# Altium PCB FIT_PM_Dual_Range_AFE.PcbDoc (part 13 of 17)
Units mm, origin at the board's own origin, x right, y up, seen from the top; angles counter-clockwise.
Board outline 259 x 114 mm, 8 copper layers (Top Layer, Mid-Layer 1, Mid-Layer 2, Layer 1, Layer 2, Mid-Layer 3, Mid-Layer 4, Bottom Layer), stack 1.616 mm thick; 963 components, 806 nets, 4757 pads, 2208 vias.
Unrouted connection lines stored in the file: 682.
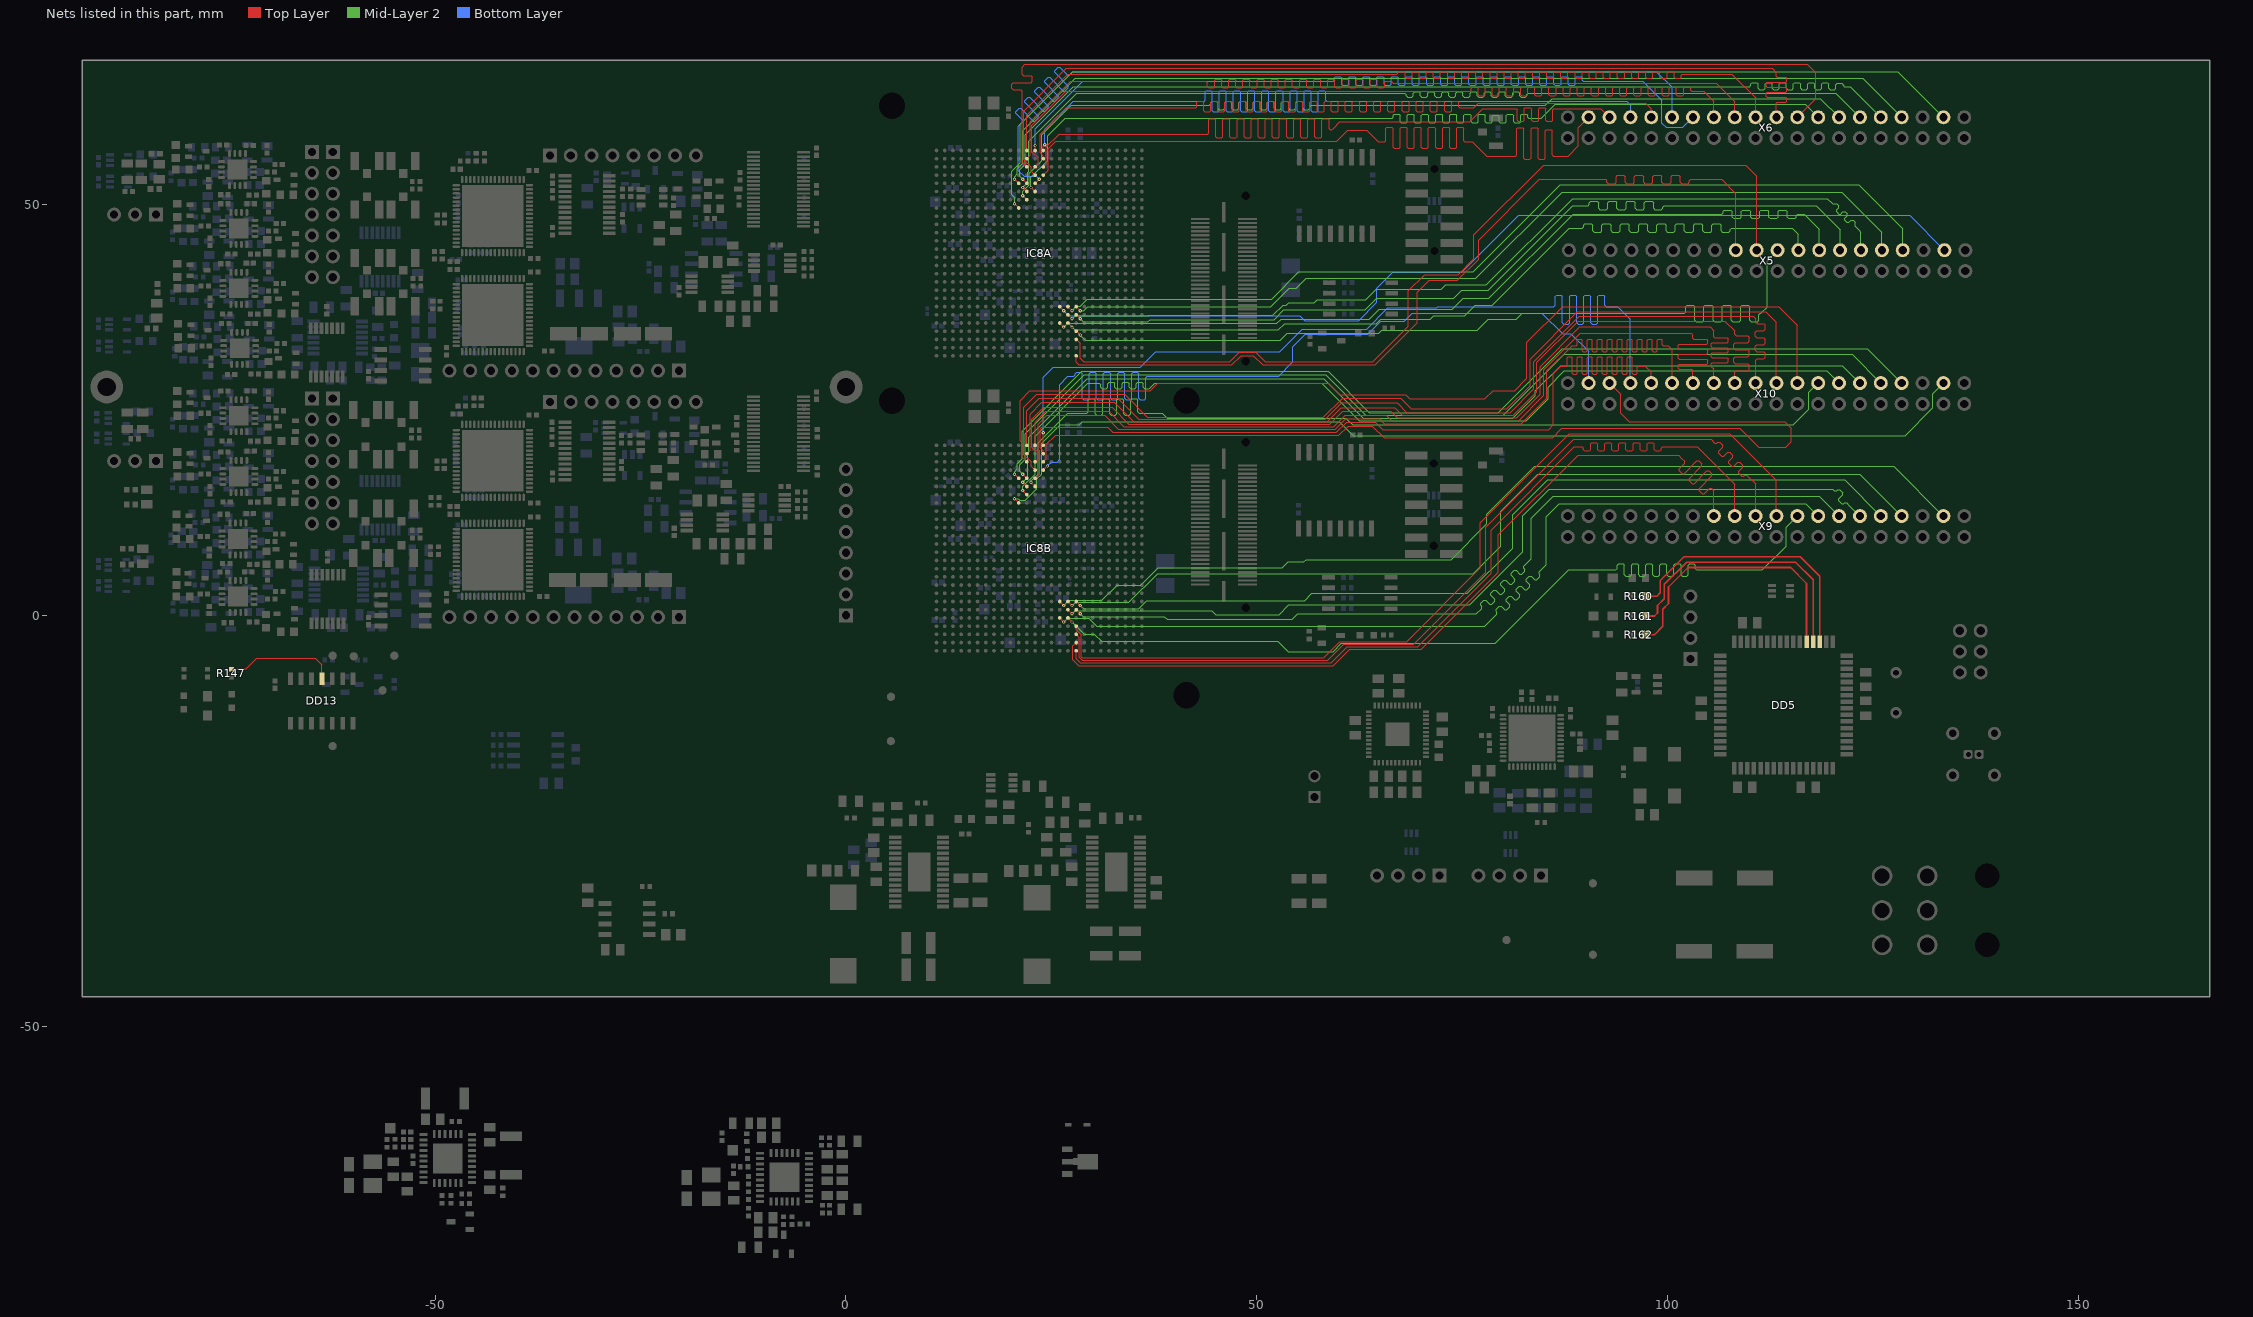
[diagram p15: the nets of this part, all layers, seen from the top]

## Via types
v1: diameter 0.5, hole 0.2, Top Layer to Bottom Layer, tented both sides, 1234 vias
v2: diameter 0.4, hole 0.2, Top Layer to Bottom Layer, tented both sides, 876 vias
v3: diameter 1, hole 0.6, Top Layer to Bottom Layer, tented both sides, 74 vias
v4: diameter 0.8, hole 0.4, Top Layer to Bottom Layer, tented both sides, 15 vias
v5: diameter 0.5, hole 0.2, Top Layer to Bottom Layer, 9 vias

## Nets (pads, with @x,y where several pads share a name; then routed paths per layer and width w, separated by ;. In a path a pad name is that pad's centre, name@x,y a point inside that pad or via, vN(x,y) a via of type N, cw(c..) or ccw(c..) an arc to the next point about the centre after c; other vN are vias at no path point) (continued)
LA0_6_2: IC8B.B9 X9.25 | length 110.2
  Top Layer w0.1: IC8B.B9@28.019,-3.314 27.619,-3.714 27.619,-5.428 28.315,-6.124 59.327,-6.124 61.333,-4.117 70.045,-4.117 79.426,5.264 79.426,9.786 89.126,19.486 101.343,19.486 101.684,19.145 102.067,18.762 102.067,18.518 101.413,17.864 101.413,17.62 101.778,17.255 102.022,17.255 103.574,18.807 103.818,18.807 104.184,18.441 104.184,18.197 102.632,16.645 102.632,16.401 102.997,16.035 103.241,16.035 104.793,17.588 105.037,17.588 105.403,17.222 105.403,16.978 103.851,15.426 103.851,15.182 104.216,14.816 104.46,14.816 105.114,15.471 105.358,15.471 105.394,15.435 105.639,15.19 X9.25@105.639,12.086
LA0_7_1: IC8A.A9 X5.23 | length 109.8
  Top Layer w0.1: IC8A.A9@28.019,31.586 28.019,30.824 28.357,30.486 46.986,30.486 48.1,31.6 49.6,31.6 50.714,30.486 64.401,30.486 69.511,35.596 69.511,39.304 70.968,40.761 74.418,40.761 77.019,43.362 77.019,45.686 84.39,53.057 92.275,53.057 92.453,53.057 92.62,52.889 92.62,52.716 92.788,52.549 93.569,52.549 93.736,52.716 93.736,53.397 93.904,53.565 94.685,53.565 94.852,53.397 94.852,52.716 95.02,52.549 95.801,52.549 95.968,52.716 95.968,53.397 96.136,53.565 96.917,53.565 97.084,53.397 97.084,52.716 97.252,52.549 98.033,52.549 98.2,52.716 98.2,53.397 98.368,53.565 99.149,53.565 99.316,53.397 99.316,52.716 99.484,52.549 100.265,52.549 100.432,52.716 100.432,53.397 100.6,53.565 101.381,53.565 101.548,53.397 101.548,52.716 101.716,52.549 102.497,52.549 102.664,52.716 102.664,52.889 102.832,53.057 102.882,53.057 106.596,53.057 108.309,51.343 X5.23@108.309,44.446
LA0_7_2: IC8B.A9 X9.23 | length 109.8
  Top Layer w0.1: IC8B.A9@28.019,-4.314 28.019,-5.263 28.537,-5.781 59.08,-5.781 61.027,-3.834 69.582,-3.834 78.519,5.103 78.519,10.377 88.663,20.521 89.262,20.521 89.592,20.521 89.765,20.348 89.765,20.185 89.937,20.013 90.454,20.013 90.627,20.185 90.627,20.856 90.799,21.029 91.316,21.029 91.489,20.856 91.489,20.185 91.661,20.013 92.178,20.013 92.351,20.185 92.351,20.856 92.523,21.029 93.04,21.029 93.213,20.856 93.213,20.185 93.385,20.013 93.902,20.013 94.075,20.185 94.075,20.856 94.247,21.029 94.764,21.029 94.937,20.856 94.937,20.185 95.109,20.013 95.626,20.013 95.799,20.185 95.799,20.856 95.971,21.029 96.488,21.029 96.661,20.856 96.661,20.185 96.833,20.013 97.35,20.013 97.523,20.185 97.523,20.856 97.695,21.029 98.212,21.029 98.385,20.856 98.385,20.185 98.557,20.013 99.074,20.013 99.247,20.185 99.247,20.348 99.419,20.521 99.469,20.521 103.612,20.521 108.179,15.954 X9.23@108.179,12.086
LA0_8_1: IC8A.C9 X5.21 | length 109.7
  Top Layer w0.1: IC8A.C9@28.019,33.586 28.502,33.103 28.502,31.272 28.931,30.843 46.743,30.843 47.9,32 49.9,32 51.057,30.843 64.11,30.843 68.456,35.189 68.456,39.523 70.419,41.486 74.508,41.486 76.433,43.411 76.433,46.3 84.939,54.806 109.518,54.806 110.849,53.475 X5.21@110.849,44.446
LA0_8_2: IC8B.C9 X9.21 | length 110.6
  Top Layer w0.1: IC8B.C9@28.019,-2.314 28.419,-2.714 28.419,-5.114 28.776,-5.471 58.615,-5.471 60.572,-3.514 69.119,-3.514 77.897,5.263 77.897,10.696 88.608,21.407 105.302,21.407 105.715,20.995 105.75,20.959 105.994,20.959 106.109,21.075 106.353,21.075 106.719,20.709 106.719,20.465 106.244,19.991 106.244,19.747 106.61,19.381 106.854,19.381 107.328,19.856 107.572,19.856 107.938,19.49 107.938,19.246 107.463,18.772 107.463,18.528 107.829,18.162 108.073,18.162 108.547,18.637 108.791,18.637 109.157,18.271 109.157,18.027 108.682,17.553 108.682,17.309 109.048,16.943 109.292,16.943 109.407,17.058 109.651,17.058 109.732,16.978 110.719,15.99 X9.21@110.719,12.086
LA0_9_1: IC8A.D9 X5.19 | length 108.2
  Top Layer w0.145: IC8A.D9@28.008,34.621 v2(28.508,34.121)
  Mid-Layer 2 w0.1: v2(28.508,34.121) 29.134,33.495 36.149,33.495 52.86,33.495 53.711,34.346 64.879,34.346 65.243,34.71 76.843,34.71 78.192,36.059 81.602,36.059 82.298,36.754 101.988,36.754 102.038,36.754 102.206,36.922 102.206,37.603 102.373,37.77 103.154,37.77 103.322,37.603 103.322,35.906 103.489,35.738 104.27,35.738 104.438,35.906 104.438,37.603 104.605,37.77 105.386,37.77 105.554,37.603 105.554,35.906 105.721,35.738 106.502,35.738 106.67,35.906 106.67,37.603 106.837,37.77 107.618,37.77 107.786,37.603 107.786,35.906 107.953,35.738 108.734,35.738 108.902,35.906 108.902,37.603 109.069,37.77 109.85,37.77 110.018,37.603 110.018,35.906 110.185,35.738 110.966,35.738 111.134,35.906 111.134,36.587 111.301,36.754 111.37,36.754 111.494,36.878 112.119,37.503 112.119,43.176 X5.19@113.389,44.446
LA0_9_2: IC8B.D9 X9.19 | length 109.9
  Top Layer w0.1: IC8B.D9@28.019,-1.314 28.019,-1.784 28.619,-2.384 28.619,-5.014 28.766,-5.161 58.132,-5.161 60.089,-3.203 68.23,-3.203 77.219,5.786 77.219,11.297 88.042,22.119 107.586,22.119 113.259,16.446 X9.19@113.259,12.086
LA0_10_1: IC8A.E10 X5.17 | length 109.6
  Top Layer w0.145: IC8A.E10@27.019,35.586 v2(27.519,35.086)
  Mid-Layer 2 w0.1: v2(27.519,35.086) 27.869,34.736 52.633,34.736 53.383,35.486 64.543,35.486 65.095,36.038 71.123,36.038 71.565,36.48 75.311,36.48 76.569,37.737 78.65,37.737 88.053,47.14 89.565,47.14 89.615,47.14 89.782,47.307 89.782,47.48 89.95,47.648 90.731,47.648 90.898,47.48 90.898,46.799 91.066,46.632 91.847,46.632 92.014,46.799 92.014,47.48 92.182,47.648 92.963,47.648 93.13,47.48 93.13,46.799 93.298,46.632 94.079,46.632 94.246,46.799 94.246,47.48 94.414,47.648 95.195,47.648 95.362,47.48 95.362,46.799 95.53,46.632 96.311,46.632 96.478,46.799 96.478,47.48 96.646,47.648 97.427,47.648 97.594,47.48 97.594,46.799 97.762,46.632 98.543,46.632 98.71,46.799 98.71,47.48 98.878,47.648 99.659,47.648 99.826,47.48 99.826,46.799 99.994,46.632 100.775,46.632 100.942,46.799 100.942,47.48 101.11,47.648 101.891,47.648 102.058,47.48 102.058,46.799 102.226,46.632 103.007,46.632 103.174,46.799 103.174,47.48 103.342,47.648 104.123,47.648 104.29,47.48 104.29,46.799 104.458,46.632 105.239,46.632 105.406,46.799 105.406,47.48 105.574,47.648 106.355,47.648 106.522,47.48 106.522,46.799 106.69,46.632 107.471,46.632 107.638,46.799 107.638,46.972 107.806,47.14 108.309,47.14 115.183,47.14 115.929,46.393 X5.17@115.929,44.446
LA0_10_2: IC8B.E10 X9.17 | length 113
  Top Layer w0.145: IC8B.E10@27.019,-0.314 v2(27.519,-0.814)
  Mid-Layer 2 w0.1: v2(27.519,-0.814) 28.979,-2.274 30.24,-2.274 31.131,-3.164 52.569,-3.164 53.819,-4.414 59.319,-4.414 60.308,-3.425 79.036,-3.425 87.987,5.525 93.668,5.525 93.718,5.525 93.891,5.698 93.891,6.115 94.063,6.287 94.58,6.287 94.753,6.115 94.753,4.936 94.925,4.763 95.442,4.763 95.615,4.936 95.615,6.115 95.787,6.287 96.304,6.287 96.477,6.115 96.477,4.936 96.649,4.763 97.166,4.763 97.339,4.936 97.339,6.115 97.511,6.287 98.028,6.287 98.201,6.115 98.201,4.936 98.373,4.763 98.89,4.763 99.063,4.936 99.063,6.115 99.235,6.287 99.752,6.287 99.925,6.115 99.925,4.936 100.097,4.763 100.614,4.763 100.787,4.936 100.787,6.115 100.959,6.287 101.476,6.287 101.649,6.115 101.649,4.936 101.821,4.763 102.338,4.763 102.511,4.936 102.511,6.092 102.683,6.264 103.2,6.264 103.373,6.092 103.373,5.698 103.545,5.525 104.106,5.525 111.559,5.525 114.446,8.413 114.446,10.733 X9.17@115.799,12.086
LA0_11_1: IC8A.E11 X5.15 | length 108
  Top Layer w0.145: IC8A.E11@26.019,35.586 v2(26.519,35.086)
  Mid-Layer 2 w0.1: v2(26.519,35.086) 26.969,35.536 52.436,35.536 52.955,36.055 63.688,36.055 64.919,37.286 73.814,37.286 75.114,38.586 78.266,38.586 88.499,48.819 106.543,48.819 106.593,48.819 106.761,48.986 106.761,49.159 106.928,49.327 107.709,49.327 107.877,49.159 107.877,48.478 108.044,48.311 108.825,48.311 108.993,48.478 108.993,49.159 109.16,49.327 109.941,49.327 110.109,49.159 110.109,48.478 110.276,48.311 111.057,48.311 111.225,48.478 111.225,49.159 111.392,49.327 112.173,49.327 112.341,49.159 112.341,48.478 112.508,48.311 113.289,48.311 113.457,48.478 113.457,49.159 113.624,49.327 114.405,49.327 114.573,49.159 114.573,48.478 114.74,48.311 115.521,48.311 115.689,48.478 115.689,48.651 115.856,48.819 116.408,48.819 116.636,48.819 118.469,46.986 X5.15@118.469,44.446
LA0_11_2: IC8B.E11 X9.15 | length 109.6
  Top Layer w0.145: IC8B.E11@26.019,-0.314 v2(26.519,-0.814)
  Mid-Layer 2 w0.1: v2(26.519,-0.814) 26.969,-0.364 29.564,-0.364 30.5,-1.301 77.78,-1.301 79.206,0.125 79.241,0.16 79.241,0.404 79.126,0.519 79.126,0.763 79.491,1.129 79.735,1.129 80.21,0.654 80.454,0.654 80.819,1.02 80.819,1.264 80.345,1.738 80.345,1.982 80.71,2.348 80.954,2.348 81.429,1.873 81.673,1.873 82.038,2.239 82.038,2.483 81.564,2.957 81.564,3.201 81.93,3.567 82.173,3.567 82.648,3.092 82.892,3.092 83.257,3.458 83.257,3.702 82.783,4.176 82.783,4.42 83.149,4.786 83.392,4.786 83.867,4.311 84.111,4.311 84.477,4.677 84.477,4.921 84.361,5.036 84.361,5.28 84.443,5.362 85.241,6.16 85.241,11.98 86.847,13.586 116.839,13.586 X9.15@118.339,12.086
LA0_12_1: IC8A.F9 X5.13 | length 109.3
  Top Layer w0.145: IC8A.F9@28.019,36.586 v2(28.519,36.086)
  Mid-Layer 2 w0.1: v2(28.519,36.086) 28.869,35.736 36.759,35.736 37.019,35.996 52.119,35.996 53.309,37.186 63.219,37.186 64.619,38.586 73.963,38.586 74.963,39.586 78.194,39.586 88.479,49.87 90.272,49.87 90.322,49.87 90.489,50.038 90.489,50.211 90.656,50.378 91.438,50.378 91.605,50.211 91.605,49.53 91.772,49.362 92.554,49.362 92.721,49.53 92.721,50.211 92.888,50.378 93.67,50.378 93.837,50.211 93.837,49.53 94.004,49.362 94.786,49.362 94.953,49.53 94.953,50.211 95.12,50.378 95.902,50.378 96.069,50.211 96.069,49.53 96.236,49.362 97.018,49.362 97.185,49.53 97.185,50.211 97.352,50.378 98.134,50.378 98.301,50.211 98.301,49.53 98.468,49.362 99.25,49.362 99.417,49.53 99.417,49.703 99.584,49.87 100.635,49.87 118.085,49.87 121.009,46.946 X5.13@121.009,44.446
LA0_12_2: IC8B.F9 X9.13 | length 109.8
  Top Layer w0.145: IC8B.F9@28.019,0.686 v2(28.519,0.186)
  Mid-Layer 2 w0.1: v2(28.519,0.186) 28.869,-0.164 38.764,-0.164 39.1,-0.5 54.333,-0.5 55.011,0.177 76.743,0.177 77.371,0.805 77.406,0.84 77.406,1.084 77.291,1.199 77.291,1.443 77.656,1.809 77.9,1.809 78.375,1.334 78.619,1.334 78.984,1.7 78.984,1.944 78.51,2.418 78.51,2.662 78.875,3.028 79.119,3.028 79.594,2.553 79.838,2.553 80.203,2.919 80.203,3.163 79.729,3.637 79.729,3.881 80.094,4.247 80.338,4.247 80.813,3.772 81.057,3.772 81.422,4.138 81.422,4.382 80.948,4.856 80.948,5.1 81.314,5.466 81.557,5.466 82.032,4.991 82.276,4.991 82.641,5.357 82.641,5.601 82.526,5.716 82.526,5.96 82.832,6.266 83.434,6.868 83.434,11.816 86.105,14.486 118.479,14.486 X9.13@120.879,12.086
LA0_13_1: IC8A.F10 X5.11 | length 109.2
  Top Layer w0.145: IC8A.F10@27.019,36.586 v2(27.519,36.086)
  Mid-Layer 2 w0.1: v2(27.519,36.086) 27.921,36.487 36.843,36.487 36.856,36.5 51.956,36.5 53.199,37.743 53.583,37.743 53.907,38.067 57.001,38.067 57.344,38.411 63.244,38.411 64.519,39.686 72.469,39.686 73.014,40.231 77.946,40.231 88.452,50.737 119.468,50.737 120.06,50.145 120.096,50.109 120.346,50.109 120.357,50.121 120.608,50.121 120.858,49.87 120.858,49.62 120.585,49.347 120.585,49.097 120.835,48.846 121.086,48.846 121.358,49.119 121.609,49.119 121.859,48.869 121.859,48.619 121.586,48.346 121.586,48.096 121.836,47.845 122.087,47.845 122.36,48.118 122.61,48.118 122.86,47.868 122.86,47.618 122.849,47.606 122.849,47.356 123.282,46.923 123.549,46.656 X5.11@123.549,44.446
LA0_13_2: IC8B.F10 X9.11 | length 108.7
  Top Layer w0.145: IC8B.F10@27.019,0.686 v2(27.519,0.186)
  Mid-Layer 2 w0.1: v2(27.519,0.186) 27.921,0.587 44.513,0.587 45,0.1 52.733,0.1 53.911,1.277 75.956,1.277 82.393,7.714 82.393,12.149 85.61,15.366 120.139,15.366 120.312,15.193 120.347,15.158 120.591,15.158 120.706,15.273 120.95,15.273 121.316,14.908 121.316,14.664 120.841,14.189 120.841,13.945 121.207,13.58 121.451,13.58 121.566,13.695 121.81,13.695 122.08,13.425 X9.11@123.419,12.086
LA0_14_1: IC8A.G9 X5.9 | length 108.5
  Top Layer w0.145: IC8A.G9@28.019,37.586 v2(28.519,37.086)
  Mid-Layer 2 w0.1: v2(28.519,37.086) 28.96,37.086 29.431,37.558 51.707,37.558 53.937,39.788 54.832,39.788 56.054,41.011 76.671,41.011 87.183,51.522 121.183,51.522 126.089,46.616 X5.9@126.089,44.446
LA0_14_2: IC8B.G9 X9.9 | length 109
  Top Layer w0.145: IC8B.G9@28.019,1.686 v2(28.519,1.186)
  Mid-Layer 2 w0.1: v2(28.519,1.186) 28.916,0.789 35.623,0.789 36.619,1.786 55.819,1.786 56.719,2.686 75.645,2.686 81.143,8.183 81.143,12.232 85.396,16.486 121.559,16.486 X9.9@125.959,12.086
LA0_15_1: IC8A.G10 X5.7 | length 113
  Top Layer w0.145: IC8A.G10@27.019,37.586 v2(27.519,37.086)
  Mid-Layer 2 w0.1: v2(27.519,37.086) 28.033,37.6 28.5,37.6 29.395,38.495 51.805,38.495 55.133,41.822 76.341,41.822 86.954,52.435 123.27,52.435 128.629,47.076 X5.7@128.629,44.446
LA0_15_2: IC8B.G10 X9.7 | length 112.9
  Top Layer w0.145: IC8B.G10@27.019,1.686 v2(27.519,1.186)
  Mid-Layer 2 w0.1: v2(27.519,1.186) 27.942,1.608 34.442,1.608 37.921,5.087 76.366,5.087 79.705,8.426 79.705,12.691 84.19,17.175 123.41,17.175 X9.7@128.499,12.086
LA1_0_1: IC8A.AC13 X6.37 | length 123.3
  Top Layer w0.1: IC8A.AC13@24.019,53.586 24.619,54.186 24.619,56.798 25.548,57.727 59.76,57.727 61.087,59.053 63.411,59.053 64.804,57.661 65.544,57.661 65.594,57.661 65.723,57.79 65.723,59.31 65.853,59.439 66.456,59.439 66.585,59.31 66.585,56.965 66.715,56.835 67.318,56.835 67.447,56.965 67.447,59.31 67.577,59.439 68.18,59.439 68.309,59.31 68.309,56.965 68.439,56.835 69.042,56.835 69.171,56.965 69.171,59.31 69.301,59.439 69.904,59.439 70.033,59.31 70.033,56.965 70.163,56.835 70.766,56.835 70.895,56.965 70.895,59.31 71.025,59.439 71.628,59.439 71.757,59.31 71.757,56.965 71.887,56.835 72.49,56.835 72.619,56.965 72.619,59.31 72.749,59.439 73.352,59.439 73.481,59.31 73.481,56.965 73.611,56.835 74.214,56.835 74.343,56.965 74.343,59.31 74.473,59.439 75.076,59.439 75.205,59.31 75.205,57.79 75.335,57.661 75.87,57.661 76.244,57.661 77.999,55.906 81.481,55.906 81.531,55.906 81.66,56.035 81.66,59.202 81.789,59.332 82.393,59.332 82.522,59.202 82.522,55.624 82.651,55.495 83.255,55.495 83.384,55.624 83.384,59.202 83.513,59.332 84.117,59.332 84.246,59.202 84.246,55.624 84.375,55.495 84.979,55.495 85.108,55.624 85.108,58.977 85.237,59.106 85.841,59.106 85.97,58.977 85.97,56.035 86.099,55.906 86.554,55.906 87.886,55.906 89.119,57.139 89.119,59.346 X6.37@90.399,60.626
LA1_0_2: IC8B.AC13 X10.37 | length 117.8
  Top Layer w0.145: IC8B.AC13@24.019,17.686 v2(24.519,18.186)
  Bottom Layer w0.1: v2(24.519,18.186) 24.972,18.639 25.687,18.639 26.019,18.971 26.019,28.083 27.022,29.086 27.667,29.086 27.717,29.086 27.889,29.258 27.889,29.421 28.062,29.594 28.579,29.594 28.751,29.421 28.751,26.411 28.924,26.238 29.441,26.238 29.613,26.411 29.613,29.421 29.786,29.594 30.303,29.594 30.475,29.421 30.475,26.411 30.648,26.238 31.165,26.238 31.337,26.411 31.337,29.421 31.51,29.594 32.027,29.594 32.199,29.421 32.199,26.411 32.372,26.238 32.889,26.238 33.061,26.411 33.061,29.421 33.234,29.594 33.751,29.594 33.923,29.421 33.923,26.411 34.096,26.238 34.613,26.238 34.785,26.411 34.785,29.421 34.958,29.594 35.475,29.594 35.647,29.421 35.647,26.411 35.82,26.238 36.337,26.238 36.509,26.411 36.509,28.913 36.682,29.086 36.92,29.086 52.651,29.086 54.405,30.84 54.405,32.717 55.896,34.208 63.491,34.208 65.077,35.794 67.964,35.794 68.956,36.786 84.719,36.786 87.234,34.271 88.248,34.271 90.399,32.12 X10.37@90.399,28.266
LA1_1_1: IC8A.AD13 X6.35 | length 118.8
  Top Layer w0.1: IC8A.AD13@24.019,54.586 24.405,54.972 24.405,57.014 25.977,58.586 43.969,58.586 44.019,58.586 44.148,58.715 44.148,60.294 44.278,60.424 44.881,60.424 45.01,60.294 45.01,58.277 45.14,58.148 45.743,58.148 45.872,58.277 45.872,60.294 46.002,60.424 46.605,60.424 46.734,60.294 46.734,58.277 46.864,58.148 47.467,58.148 47.596,58.277 47.596,60.294 47.726,60.424 48.329,60.424 48.458,60.294 48.458,58.277 48.588,58.148 49.191,58.148 49.32,58.277 49.32,60.294 49.45,60.424 50.053,60.424 50.182,60.294 50.182,58.277 50.312,58.148 50.915,58.148 51.044,58.277 51.044,60.294 51.174,60.424 51.777,60.424 51.906,60.294 51.906,58.277 52.036,58.148 52.639,58.148 52.768,58.277 52.768,60.294 52.898,60.424 53.501,60.424 53.63,60.294 53.63,58.277 53.76,58.148 54.363,58.148 54.492,58.277 54.492,60.294 54.622,60.424 55.225,60.424 55.354,60.294 55.354,58.277 55.484,58.148 56.087,58.148 56.216,58.277 56.216,60.294 56.346,60.424 56.949,60.424 57.078,60.294 57.078,58.277 57.208,58.148 57.811,58.148 57.94,58.277 57.94,60.294 58.07,60.424 58.673,60.424 58.802,60.294 58.802,59.211 58.932,59.081 59.114,59.081 59.344,59.31 60.119,60.086 75.919,60.086 77.519,61.686 80.677,61.686 81.589,61.686 81.719,61.557 81.719,60.272 81.848,60.143 82.451,60.143 82.581,60.272 82.581,61.638 82.71,61.767 83.313,61.767 83.443,61.638 83.443,60.272 83.572,60.143 84.175,60.143 84.305,60.272 84.305,61.638 84.434,61.767 85.037,61.767 85.167,61.638 85.167,60.272 85.296,60.143 85.899,60.143 86.029,60.272 86.029,61.557 86.158,61.686 86.745,61.686 91.879,61.686 X6.35@92.939,60.626
LA1_1_2: IC8B.AD13 X10.35 | length 123.5
  Top Layer w0.1: IC8B.AD13@24.019,18.686 24.405,19.072 24.405,20.817 25.509,21.921 60.001,21.921 61.126,23.046 64.069,23.046 65.489,21.625 86.003,21.625 87.14,22.762 108.786,22.762 111.079,20.469 114.375,20.469 115.064,21.158 115.064,22.77 114.288,23.546 95.359,23.546 94.319,24.586 94.319,26.886 X10.35@92.939,28.266
LA1_2_1: IC8A.AF13 X6.33 | length 117.5
  Top Layer w0.1: IC8A.AF13@24.019,56.586 24.019,57.097 24.187,57.265 v2(24.187,57.291)
  Bottom Layer w0.1: v2(24.187,57.291) 24.187,59.138 27.636,62.586 43.54,62.586 43.59,62.586 43.719,62.715 43.719,63.727 43.849,63.856 44.452,63.856 44.581,63.727 44.581,61.445 44.71,61.316 45.314,61.316 45.443,61.445 45.443,63.727 45.572,63.856 46.176,63.856 46.305,63.727 46.305,61.445 46.434,61.316 47.038,61.316 47.167,61.445 47.167,63.727 47.296,63.856 47.9,63.856 48.029,63.727 48.029,61.445 48.158,61.316 48.762,61.316 48.891,61.445 48.891,63.727 49.02,63.856 49.624,63.856 49.753,63.727 49.753,61.445 49.882,61.316 50.486,61.316 50.615,61.445 50.615,63.727 50.744,63.856 51.348,63.856 51.477,63.727 51.477,61.445 51.606,61.316 52.21,61.316 52.339,61.445 52.339,63.727 52.468,63.856 53.072,63.856 53.201,63.727 53.201,61.445 53.33,61.316 53.934,61.316 54.063,61.445 54.063,63.727 54.192,63.856 54.796,63.856 54.925,63.727 54.925,61.445 55.054,61.316 55.658,61.316 55.787,61.445 55.787,63.727 55.916,63.856 56.52,63.856 56.649,63.727 56.649,61.445 56.778,61.316 57.382,61.316 57.511,61.445 57.511,63.727 57.64,63.856 58.244,63.856 58.373,63.727 58.373,62.715 58.502,62.586 59.319,62.586 95.038,62.586 95.538,62.087 95.538,60.684 X6.33@95.479,60.626
LA1_2_2: IC8B.AF13 X10.33 | length 114.3
  Top Layer w0.1: IC8B.AF13@24.019,20.686 v2(24.019,22.22)
  Bottom Layer w0.1: v2(24.019,22.22) 24.019,29.006 25.24,30.227 35.83,30.227 37.704,32.1 52.804,32.1 55.53,34.827 63.36,34.827 65.961,37.427 71.895,37.427 72.02,37.552 86.126,37.552 86.176,37.552 86.349,37.725 86.349,38.814 86.521,38.986 87.038,38.986 87.211,38.814 87.211,35.602 87.383,35.43 87.9,35.43 88.073,35.602 88.073,38.814 88.245,38.986 88.762,38.986 88.935,38.814 88.935,35.602 89.107,35.43 89.624,35.43 89.797,35.602 89.797,38.814 89.969,38.986 90.486,38.986 90.659,38.814 90.659,35.602 90.831,35.43 91.348,35.43 91.521,35.602 91.521,38.814 91.693,38.986 92.21,38.986 92.383,38.814 92.383,37.725 92.555,37.552 93.109,37.552 93.953,37.552 95.479,36.026 X10.33@95.479,28.266
LA1_3_1: IC8A.AE13 X6.31 | length 123.8
  Top Layer w0.1: IC8A.AE13@24.019,55.586 24.019,55.904 23.636,56.288 23.636,58.586 26.836,61.786 42.504,61.786 42.554,61.786 42.684,61.915 42.684,62.468 42.813,62.598 43.416,62.598 43.546,62.468 43.546,61.407 43.675,61.278 44.278,61.278 44.408,61.407 44.408,62.468 44.537,62.598 45.14,62.598 45.27,62.468 45.27,61.407 45.399,61.278 46.002,61.278 46.132,61.407 46.132,62.468 46.261,62.598 46.864,62.598 46.994,62.468 46.994,61.407 47.123,61.278 47.726,61.278 47.856,61.407 47.856,62.468 47.985,62.598 48.588,62.598 48.718,62.468 48.718,61.407 48.847,61.278 49.45,61.278 49.58,61.407 49.58,62.468 49.709,62.598 50.312,62.598 50.442,62.468 50.442,61.407 50.571,61.278 51.174,61.278 51.304,61.407 51.304,62.468 51.433,62.598 52.036,62.598 52.166,62.468 52.166,61.407 52.295,61.278 52.898,61.278 53.028,61.407 53.028,62.468 53.157,62.598 53.76,62.598 53.89,62.468 53.89,61.407 54.019,61.278 54.622,61.278 54.752,61.407 54.752,62.468 54.881,62.598 55.484,62.598 55.614,62.468 55.614,61.407 55.743,61.278 56.346,61.278 56.476,61.407 56.476,62.468 56.605,62.598 57.208,62.598 57.338,62.468 57.338,61.407 57.467,61.278 58.07,61.278 58.2,61.407 58.2,62.468 58.329,62.598 58.932,62.598 59.062,62.468 59.062,61.407 59.191,61.278 59.794,61.278 59.924,61.407 59.924,62.468 60.053,62.598 60.656,62.598 60.786,62.468 60.786,61.407 60.915,61.278 61.518,61.278 61.648,61.407 61.648,62.468 61.777,62.598 62.38,62.598 62.51,62.468 62.51,61.407 62.639,61.278 63.242,61.278 63.372,61.407 63.372,62.468 63.501,62.598 64.104,62.598 64.234,62.468 64.234,61.407 64.363,61.278 64.966,61.278 65.096,61.407 65.096,62.468 65.225,62.598 65.828,62.598 65.958,62.468 65.958,61.407 66.087,61.278 66.69,61.278 66.82,61.407 66.82,62.468 66.949,62.598 67.552,62.598 67.682,62.468 67.682,61.407 67.811,61.278 68.414,61.278 68.544,61.407 68.544,62.468 68.673,62.598 69.276,62.598 69.406,62.468 69.406,61.407 69.535,61.278 70.138,61.278 70.268,61.407 70.268,62.468 70.397,62.598 71,62.598 71.13,62.468 71.13,61.407 71.259,61.278 71.862,61.278 71.992,61.407 71.992,62.468 72.121,62.598 72.724,62.598 72.854,62.468 72.854,61.407 72.983,61.278 73.586,61.278 73.716,61.407 73.716,62.468 73.845,62.598 74.448,62.598 74.578,62.468 74.578,61.915 74.707,61.786 76.362,61.786 76.387,61.786 76.931,62.33 97.337,62.33 98.019,61.647 X6.31@98.019,60.626
LA1_3_2: IC8B.AE13 X10.31 | length 115.8
  Top Layer w0.1: IC8B.AE13@24.019,19.686 24.019,20.004 23.636,20.388 23.636,22.702 23.847,22.914 31.841,22.914 32.499,22.256 59.671,22.256 60.947,23.533 64.398,23.533 65.328,22.602 85.536,22.602 86.119,23.186 86.119,29.435 87.02,30.336 87.619,30.336 87.669,30.336 87.79,30.457 87.79,31.383 87.912,31.505 88.277,31.505 88.398,31.383 88.398,29.441 88.52,29.32 88.885,29.32 89.006,29.441 89.006,31.383 89.128,31.505 89.493,31.505 89.614,31.383 89.614,29.441 89.736,29.32 90.101,29.32 90.222,29.441 90.222,31.383 90.344,31.505 90.709,31.505 90.83,31.383 90.83,29.441 90.952,29.32 91.317,29.32 91.438,29.441 91.438,31.383 91.56,31.505 91.925,31.505 92.046,31.383 92.046,29.441 92.168,29.32 92.533,29.32 92.654,29.441 92.654,31.383 92.776,31.505 93.141,31.505 93.262,31.383 93.262,29.441 93.384,29.32 93.749,29.32 93.87,29.441 93.87,31.383 93.992,31.505 94.357,31.505 94.478,31.383 94.478,29.441 94.6,29.32 94.965,29.32 95.086,29.441 95.086,31.383 95.208,31.505 95.573,31.505 95.694,31.383 95.694,29.441 95.816,29.32 96.181,29.32 96.302,29.441 96.302,30.214 96.424,30.336 96.822,30.336 97.318,30.336 98.019,29.634 X10.31@98.019,28.266
LA1_4_1: IC8A.AB14 X6.29 | length 118.2
  Top Layer w0.145: IC8A.AB14@23.019,52.586 v2(23.519,53.086)
  Bottom Layer w0.1: v2(23.519,53.086) 23.174,53.431 21.679,53.431 20.966,54.144 20.966,59.533 21.46,60.027 21.496,60.063 21.496,60.245 20.649,61.092 20.649,61.275 21.075,61.702 21.258,61.702 22.812,60.148 22.995,60.148 23.421,60.575 23.421,60.758 21.755,62.425 21.755,62.607 22.181,63.034 22.364,63.034 24.031,61.367 24.214,61.367 24.64,61.794 24.64,61.977 22.974,63.644 22.974,63.827 23.4,64.253 23.583,64.253 25.25,62.586 25.433,62.586 25.86,63.013 25.86,63.196 24.193,64.863 24.193,65.046 24.619,65.472 24.802,65.472 26.469,63.805 26.652,63.805 27.079,64.232 27.079,64.415 25.412,66.082 25.412,66.265 25.838,66.691 26.021,66.691 26.981,65.731 27.164,65.731 27.457,66.024 27.606,66.173 98.639,66.173 100.559,64.253 X6.29@100.559,60.626
LA1_4_2: IC8B.AB14 X10.29 | length 119.5
  Top Layer w0.1: IC8B.AB14@23.019,16.686 23.594,17.261 23.594,20.03 23.415,20.209 23.415,23.282 24.462,24.329 31.471,24.329 33.153,22.647 59.555,22.647 60.825,23.917 64.951,23.917 65.548,23.32 82.194,23.32 85.306,26.432 85.306,29.753 88.377,32.823 88.821,32.823 88.871,32.823 88.993,32.945 88.993,33.464 89.115,33.585 89.479,33.585 89.601,33.464 89.601,32.183 89.723,32.061 90.087,32.061 90.209,32.183 90.209,33.464 90.331,33.585 90.695,33.585 90.817,33.464 90.817,32.183 90.939,32.061 91.303,32.061 91.425,32.183 91.425,33.464 91.547,33.585 91.911,33.585 92.033,33.464 92.033,32.183 92.155,32.061 92.519,32.061 92.641,32.183 92.641,33.464 92.763,33.585 93.127,33.585 93.249,33.464 93.249,32.183 93.371,32.061 93.735,32.061 93.857,32.183 93.857,33.464 93.979,33.585 94.343,33.585 94.465,33.464 94.465,32.183 94.587,32.061 94.951,32.061 95.073,32.183 95.073,33.464 95.195,33.585 95.559,33.585 95.681,33.464 95.681,32.183 95.803,32.061 96.167,32.061 96.289,32.183 96.289,33.464 96.411,33.585 96.775,33.585 96.897,33.464 96.897,32.183 97.019,32.061 97.383,32.061 97.505,32.183 97.505,33.464 97.627,33.585 97.991,33.585 98.113,33.464 98.113,32.183 98.235,32.061 98.599,32.061 98.721,32.183 98.721,33.464 98.843,33.585 99.207,33.585 99.329,33.464 99.329,32.945 99.451,32.823 99.924,32.823 100.071,32.823 100.559,32.335 X10.29@100.559,28.266
LA1_5_1: IC8A.AF14 X6.27 | length 119.8
  Top Layer w0.1: IC8A.AF14@23.019,56.586 v2(23.019,57.186)
  Bottom Layer w0.1: v2(23.019,57.186) 23.019,59.259 28.791,65.031 59.277,65.031 59.327,65.031 59.456,65.16 59.456,65.41 59.585,65.539 60.189,65.539 60.318,65.41 60.318,64.652 60.447,64.523 61.051,64.523 61.18,64.652 61.18,65.41 61.309,65.539 61.913,65.539 62.042,65.41 62.042,64.652 62.171,64.523 62.775,64.523 62.904,64.652 62.904,65.41 63.033,65.539 63.637,65.539 63.766,65.41 63.766,64.652 63.895,64.523 64.499,64.523 64.628,64.652 64.628,65.41 64.757,65.539 65.361,65.539 65.49,65.41 65.49,64.652 65.619,64.523 66.223,64.523 66.352,64.652 66.352,65.41 66.481,65.539 67.085,65.539 67.214,65.41 67.214,64.652 67.343,64.523 67.947,64.523 68.076,64.652 68.076,65.41 68.205,65.539 68.809,65.539 68.938,65.41 68.938,64.652 69.067,64.523 69.671,64.523 69.8,64.652 69.8,65.41 69.929,65.539 70.533,65.539 70.662,65.41 70.662,64.652 70.791,64.523 71.395,64.523 71.524,64.652 71.524,65.41 71.653,65.539 72.257,65.539 72.386,65.41 72.386,64.652 72.515,64.523 73.119,64.523 73.248,64.652 73.248,65.41 73.377,65.539 73.981,65.539 74.11,65.41 74.11,64.652 74.239,64.523 74.843,64.523 74.972,64.652 74.972,65.41 75.101,65.539 75.705,65.539 75.834,65.41 75.834,64.652 75.963,64.523 76.567,64.523 76.696,64.652 76.696,65.41 76.825,65.539 77.429,65.539 77.558,65.41 77.558,64.652 77.687,64.523 78.291,64.523 78.42,64.652 78.42,65.41 78.549,65.539 79.153,65.539 79.282,65.41 79.282,64.652 79.411,64.523 80.015,64.523 80.144,64.652 80.144,65.41 80.273,65.539 80.877,65.539 81.006,65.41 81.006,64.652 81.135,64.523 81.739,64.523 81.868,64.652 81.868,65.41 81.997,65.539 82.601,65.539 82.73,65.41 82.73,64.652 82.859,64.523 83.463,64.523 83.592,64.652 83.592,65.41 83.721,65.539 84.325,65.539 84.454,65.41 84.454,64.652 84.583,64.523 85.187,64.523 85.316,64.652 85.316,65.41 85.445,65.539 86.049,65.539 86.178,65.41 86.178,64.652 86.307,64.523 86.911,64.523 87.04,64.652 87.04,65.41 87.169,65.539 87.773,65.539 87.902,65.41 87.902,64.652 88.031,64.523 88.635,64.523 88.764,64.652 88.764,65.41 88.893,65.539 89.497,65.539 89.626,65.41 89.626,65.16 89.755,65.031 90.572,65.031 97.011,65.031 99.319,62.723 99.319,59.886 99.819,59.386 101.859,59.386 X6.27@103.099,60.626
LA1_5_2: IC8B.AF14 X10.27 | length 117.7
  Top Layer w0.1: IC8B.AF14@23.019,20.686 23.019,23.508 24.341,24.831 31.969,24.831 33.841,22.959 59.38,22.959 60.794,24.374 65.741,24.374 66.501,23.613 81.803,23.613 84.959,26.769 84.959,29.908 89.359,34.309 102.896,34.309 103.099,34.106 103.099,33.775 103.099,33.725 103.221,33.603 104.756,33.603 104.877,33.481 104.877,33.117 104.756,32.995 101.443,32.995 101.321,32.873 101.321,32.509 101.443,32.387 104.756,32.387 104.877,32.265 104.877,31.901 104.756,31.779 101.443,31.779 101.321,31.657 101.321,31.293 101.443,31.171 104.756,31.171 104.877,31.049 104.877,30.685 104.756,30.563 101.443,30.563 101.321,30.441 101.321,30.077 101.443,29.955 102.978,29.955 103.099,29.833 103.099,29.57 X10.27@103.099,28.266
LA1_6_1: IC8A.AD14 X6.25 | length 119.4
  Top Layer w0.1: IC8A.AD14@23.019,54.586 23.394,54.961 23.394,55.741 23.049,56.086 22.919,56.086 22.619,56.386 22.619,59.652 26.734,63.766 75.907,63.766 75.957,63.766 76.086,63.895 76.086,64.145 76.216,64.274 76.819,64.274 76.948,64.145 76.948,63.387 77.078,63.258 77.681,63.258 77.81,63.387 77.81,64.145 77.94,64.274 78.543,64.274 78.672,64.145 78.672,63.387 78.802,63.258 79.405,63.258 79.534,63.387 79.534,64.145 79.664,64.274 80.267,64.274 80.396,64.145 80.396,63.387 80.526,63.258 81.129,63.258 81.258,63.387 81.258,64.145 81.388,64.274 81.991,64.274 82.12,64.145 82.12,63.387 82.25,63.258 82.853,63.258 82.982,63.387 82.982,64.145 83.112,64.274 83.715,64.274 83.844,64.145 83.844,63.387 83.974,63.258 84.577,63.258 84.706,63.387 84.706,64.145 84.836,64.274 85.439,64.274 85.568,64.145 85.568,63.387 85.698,63.258 86.301,63.258 86.43,63.387 86.43,64.145 86.56,64.274 87.163,64.274 87.292,64.145 87.292,63.387 87.422,63.258 88.025,63.258 88.154,63.387 88.154,64.145 88.284,64.274 88.887,64.274 89.016,64.145 89.016,63.387 89.146,63.258 89.749,63.258 89.878,63.387 89.878,64.145 90.008,64.274 90.611,64.274 90.74,64.145 90.74,63.387 90.87,63.258 91.473,63.258 91.602,63.387 91.602,64.145 91.732,64.274 92.335,64.274 92.464,64.145 92.464,63.387 92.594,63.258 93.197,63.258 93.326,63.387 93.326,64.145 93.456,64.274 94.059,64.274 94.188,64.145 94.188,63.387 94.318,63.258 94.921,63.258 95.05,63.387 95.05,64.145 95.18,64.274 95.783,64.274 95.912,64.145 95.912,63.387 96.042,63.258 96.645,63.258 96.774,63.387 96.774,64.145 96.904,64.274 97.507,64.274 97.636,64.145 97.636,63.387 97.766,63.258 98.369,63.258 98.498,63.387 98.498,64.145 98.628,64.274 99.231,64.274 99.36,64.145 99.36,63.387 99.49,63.258 100.093,63.258 100.222,63.387 100.222,64.145 100.352,64.274 100.955,64.274 101.084,64.145 101.084,63.387 101.214,63.258 101.817,63.258 101.946,63.387 101.946,64.145 102.076,64.274 102.679,64.274 102.808,64.145 102.808,63.895 102.938,63.766 103.653,63.766 104.439,63.766 105.639,62.566 X6.25@105.639,60.626
LA1_6_2: IC8B.AD14 X10.25 | length 115.8
  Top Layer w0.1: IC8B.AD14@23.019,18.686 23.394,19.061 23.394,19.841 23.049,20.186 22.919,20.186 22.619,20.486 22.619,23.862 24.071,25.314 32.386,25.314 34.414,23.286 58.91,23.286 60.477,24.853 66.282,24.853 67.076,24.059 81.627,24.059 84.481,26.913 84.481,30.247 89.34,35.106 105.199,35.106 105.639,34.666 105.639,33.958 105.639,33.908 105.761,33.786 107.296,33.786 107.417,33.665 107.417,33.3 107.296,33.178 105.449,33.178 105.328,33.057 105.328,32.692 105.449,32.57 107.296,32.57 107.417,32.449 107.417,32.084 107.296,31.962 105.449,31.962 105.328,31.841 105.328,31.476 105.449,31.354 107.296,31.354 107.417,31.233 107.417,30.868 107.296,30.746 105.449,30.746 105.328,30.625 105.328,30.26 105.449,30.138 105.518,30.138 105.639,30.017 105.639,29.378 X10.25@105.639,28.266
LA1_7_1: IC8A.AE15 X6.23 | length 119.4
  Top Layer w0.1: IC8A.AE15@22.019,55.586 22.419,55.986 22.419,60.104 27.346,65.031 42.964,65.031 43.42,65.031 43.876,65.031 44.005,64.902 44.005,64.319 44.134,64.189 44.738,64.189 44.867,64.319 44.867,65.154 44.996,65.283 45.6,65.283 45.729,65.154 45.729,64.319 45.858,64.189 46.462,64.189 46.591,64.319 46.591,65.154 46.72,65.283 47.324,65.283 47.453,65.154 47.453,64.319 47.582,64.189 48.186,64.189 48.315,64.319 48.315,65.154 48.444,65.283 49.048,65.283 49.177,65.154 49.177,64.319 49.306,64.189 49.91,64.189 50.039,64.319 50.039,65.154 50.168,65.283 50.772,65.283 50.901,65.154 50.901,64.319 51.03,64.189 51.634,64.189 51.763,64.319 51.763,65.154 51.892,65.283 52.496,65.283 52.625,65.154 52.625,64.319 52.754,64.189 53.358,64.189 53.487,64.319 53.487,65.154 53.616,65.283 54.22,65.283 54.349,65.154 54.349,64.319 54.478,64.189 55.082,64.189 55.211,64.319 55.211,65.154 55.34,65.283 55.944,65.283 56.073,65.154 56.073,64.319 56.202,64.189 56.806,64.189 56.935,64.319 56.935,65.154 57.064,65.283 57.668,65.283 57.797,65.154 57.797,64.319 57.926,64.189 58.53,64.189 58.659,64.319 58.659,65.154 58.788,65.283 59.392,65.283 59.521,65.154 59.521,64.319 59.65,64.189 60.254,64.189 60.383,64.319 60.383,65.154 60.512,65.283 61.116,65.283 61.245,65.154 61.245,64.319 61.374,64.189 61.978,64.189 62.107,64.319 62.107,65.154 62.236,65.283 62.84,65.283 62.969,65.154 62.969,64.319 63.098,64.189 63.702,64.189 63.831,64.319 63.831,65.154 63.96,65.283 64.564,65.283 64.693,65.154 64.693,64.319 64.822,64.189 65.426,64.189 65.555,64.319 65.555,64.902 65.684,65.031 66.352,65.031 66.609,64.774 105.931,64.774 108.179,62.526 X6.23@108.179,60.626
LA1_7_2: IC8B.AE15 X10.23 | length 117
  Top Layer w0.1: IC8B.AE15@22.019,19.686 22.419,20.086 22.419,24.501 23.843,25.924 32.676,25.924 35.012,23.588 58.602,23.588 60.275,25.26 66.773,25.26 67.704,24.329 81.198,24.329 84.084,27.216 84.084,30.798 89.104,35.819 106.986,35.819 108.179,34.626 108.179,34.274 108.179,34.224 108.352,34.052 109.785,34.052 109.957,33.88 109.957,33.362 109.785,33.19 108.237,33.19 108.064,33.018 108.064,32.5 108.237,32.328 109.785,32.328 109.957,32.156 109.957,31.638 109.785,31.466 108.237,31.466 108.064,31.294 108.064,30.776 108.237,30.604 109.785,30.604 109.957,30.432 109.957,29.914 109.785,29.742 108.352,29.742 108.179,29.57 108.179,29.306 X10.23@108.179,28.266
LA1_8_1: IC8A.AF15 X6.21 | length 123.7
  Top Layer w0.1: IC8A.AF15@22.019,56.586 22.019,60.88 27.024,65.884 67.008,65.884 67.058,65.884 67.187,66.014 67.187,66.029 67.317,66.158 67.92,66.158 68.049,66.029 68.049,65.506 68.179,65.376 68.782,65.376 68.911,65.506 68.911,66.029 69.041,66.158 69.644,66.158 69.773,66.029 69.773,65.506 69.903,65.376 70.506,65.376 70.635,65.506 70.635,66.029 70.765,66.158 71.368,66.158 71.497,66.029 71.497,65.506 71.627,65.376 72.23,65.376 72.359,65.506 72.359,66.029 72.489,66.158 73.092,66.158 73.221,66.029 73.221,65.506 73.351,65.376 73.954,65.376 74.083,65.506 74.083,66.029 74.213,66.158 74.816,66.158 74.945,66.029 74.945,65.506 75.075,65.376 75.678,65.376 75.807,65.506 75.807,66.029 75.937,66.158 76.54,66.158 76.669,66.029 76.669,65.506 76.799,65.376 77.402,65.376 77.531,65.506 77.531,66.029 77.661,66.158 78.264,66.158 78.393,66.029 78.393,65.506 78.523,65.376 79.126,65.376 79.255,65.506 79.255,66.029 79.385,66.158 79.988,66.158 80.117,66.029 80.117,65.506 80.247,65.376 80.85,65.376 80.979,65.506 80.979,66.029 81.109,66.158 81.712,66.158 81.841,66.029 81.841,65.506 81.971,65.376 82.574,65.376 82.703,65.506 82.703,66.029 82.833,66.158 83.436,66.158 83.565,66.029 83.565,65.506 83.695,65.376 84.298,65.376 84.427,65.506 84.427,66.029 84.557,66.158 85.16,66.158 85.289,66.029 85.289,65.506 85.419,65.376 86.022,65.376 86.151,65.506 86.151,66.029 86.281,66.158 86.884,66.158 87.013,66.029 87.013,65.506 87.143,65.376 87.746,65.376 87.875,65.506 87.875,66.029 88.005,66.158 88.608,66.158 88.737,66.029 88.737,65.506 88.867,65.376 89.47,65.376 89.599,65.506 89.599,66.029 89.729,66.158 90.332,66.158 90.461,66.029 90.461,65.506 90.591,65.376 91.194,65.376 91.323,65.506 91.323,66.029 91.453,66.158 92.056,66.158 92.185,66.029 92.185,65.506 92.315,65.376 92.918,65.376 93.047,65.506 93.047,66.029 93.177,66.158 93.78,66.158 93.909,66.029 93.909,65.506 94.039,65.376 94.642,65.376 94.771,65.506 94.771,66.029 94.901,66.158 95.504,66.158 95.633,66.029 95.633,65.506 95.763,65.376 96.366,65.376 96.495,65.506 96.495,66.029 96.625,66.158 97.228,66.158 97.357,66.029 97.357,65.506 97.487,65.376 98.09,65.376 98.219,65.506 98.219,66.029 98.349,66.158 98.952,66.158 99.081,66.029 99.081,65.506 99.211,65.376 99.814,65.376 99.943,65.506 99.943,66.029 100.073,66.158 100.676,66.158 100.805,66.029 100.805,65.506 100.935,65.376 101.538,65.376 101.667,65.506 101.667,65.755 101.797,65.884 106.754,65.884 107.821,65.884 110.719,62.986 X6.21@110.719,60.626
LA1_8_2: IC8B.AF15 X10.21 | length 116.6
  Top Layer w0.1: IC8B.AF15@22.019,20.686 22.019,24.901 23.542,26.424 33.076,26.424 35.657,23.843 58.351,23.843 60.362,25.854 67.101,25.854 68.274,24.681 80.837,24.681 83.726,27.57 83.726,30.871 89.235,36.38 110.456,36.38 110.719,36.117 110.719,35.738 110.719,35.688 110.892,35.516 111.707,35.516 111.879,35.343 111.879,34.826 111.707,34.654 110.844,34.654 110.671,34.481 110.671,33.964 110.844,33.792 111.707,33.792 111.879,33.619 111.879,33.102 111.707,32.93 110.844,32.93 110.671,32.757 110.671,32.24 110.844,32.068 111.707,32.068 111.879,31.895 111.879,31.378 111.707,31.206 110.892,31.206 110.719,31.033 110.719,30.686 X10.21@110.719,28.266
LA1_9_1: IC8A.AC14 X6.19 | length 119.6
  Top Layer w0.1: IC8A.AC14@23.019,53.586 22.563,54.042 22.563,54.572 22.134,55.001 22.073,55.001 21.633,55.442 21.633,61.362 26.838,66.566 112.733,66.566 113.259,66.04 113.259,65.686 113.259,65.636 113.381,65.514 114.408,65.514 114.529,65.393 114.529,65.028 114.408,64.906 112.111,64.906 111.989,64.785 111.989,64.42 112.111,64.298 114.408,64.298 114.529,64.177 114.529,63.812 114.408,63.69 112.111,63.69 111.989,63.569 111.989,63.204 112.111,63.082 114.408,63.082 114.529,62.961 114.529,62.596 114.408,62.474 113.381,62.474 113.259,62.353 113.259,62.04 X6.19@113.259,60.626
LA1_9_2: IC8B.AC14 X10.19 | length 117.9
  Top Layer w0.1: IC8B.AC14@23.019,17.686 22.563,18.142 22.563,18.672 22.134,19.101 22.073,19.101 21.633,19.542 21.633,25.323 23.196,26.885 33.915,26.885 36.684,24.116 58.118,24.116 60.444,26.442 67.513,26.442 68.828,25.127 80.444,25.127 83.273,27.956 83.273,31.199 89.015,36.941 111.964,36.941 113.259,35.646 X10.19@113.259,28.266
LA1_10_1: IC8A.AD15 X6.17 | length 120.4
  Top Layer w0.1: IC8A.AD15@22.019,54.586 21.433,55.172 21.433,63.739 21.433,63.789 21.261,63.961 20.336,63.961 20.163,64.134 20.163,64.651 20.336,64.823 22.531,64.823 22.703,64.996 22.703,65.513 22.531,65.685 21.606,65.685 21.433,65.858 21.433,66.152 21.433,66.739 21.767,67.073 117.032,67.073 118.061,66.044 118.061,62.887 X6.17@115.799,60.626
LA1_10_2: IC8B.AD15 X10.17 | length 119.3
  Top Layer w0.1: IC8B.AD15@22.019,18.686 21.433,19.272 21.433,20.972 21.183,21.222 21.183,26.119 22.383,27.319 37.019,27.319 37.956,28.255 58.674,28.255 60.075,26.855 68.119,26.855 68.619,26.354 77.744,26.354 78.757,27.366 81.374,27.366 82.885,28.878 82.885,33.252 87.221,37.588 113.517,37.588 115.799,35.306 X10.17@115.799,28.266
LA1_11_1: IC8A.AA14 X6.15 | length 119.9
  Top Layer w0.145: v2(22.519,52.086) IC8A.AA14@23.019,51.586
  Mid-Layer 2 w0.1: v2(22.519,52.086) 22.519,53.309 24.55,55.339 24.55,58.374 26.662,60.486 66.423,60.486 66.473,60.486 66.602,60.615 66.602,60.865 66.732,60.994 67.335,60.994 67.464,60.865 67.464,60.107 67.594,59.978 68.197,59.978 68.326,60.107 68.326,60.865 68.456,60.994 69.059,60.994 69.188,60.865 69.188,60.107 69.318,59.978 69.921,59.978 70.05,60.107 70.05,60.865 70.18,60.994 70.783,60.994 70.912,60.865 70.912,60.107 71.042,59.978 71.645,59.978 71.774,60.107 71.774,60.865 71.904,60.994 72.507,60.994 72.636,60.865 72.636,60.107 72.766,59.978 73.369,59.978 73.498,60.107 73.498,60.865 73.628,60.994 74.231,60.994 74.36,60.865 74.36,60.107 74.49,59.978 75.093,59.978 75.222,60.107 75.222,60.865 75.352,60.994 75.955,60.994 76.084,60.865 76.084,60.107 76.214,59.978 76.817,59.978 76.946,60.107 76.946,60.865 77.076,60.994 77.679,60.994 77.808,60.865 77.808,60.107 77.938,59.978 78.541,59.978 78.67,60.107 78.67,60.75 78.8,60.88 79.403,60.88 79.532,60.75 79.532,60.107 79.662,59.978 80.265,59.978 80.394,60.107 80.394,60.865 80.524,60.994 81.127,60.994 81.256,60.865 81.256,60.107 81.386,59.978 81.989,59.978 82.118,60.107 82.118,60.865 82.248,60.994 82.851,60.994 82.98,60.865 82.98,60.615 83.11,60.486 83.522,60.486 84.638,60.486 86.344,62.192 116.773,62.192 X6.15@118.339,60.626
LA1_11_2: IC8B.AA14 X10.15 | length 120.1
  Top Layer w0.145: v2(22.519,16.186) IC8B.AA14@23.019,15.686
  Mid-Layer 2 w0.1: v2(22.519,16.186) 22.577,16.243 22.577,16.4 23.379,17.203 23.379,20.989 26.976,24.586 29.286,24.586 29.336,24.586 29.508,24.758 29.508,26.191 29.68,26.364 30.198,26.364 30.37,26.191 30.37,24.539 30.542,24.367 31.06,24.367 31.232,24.539 31.232,26.191 31.404,26.364 31.922,26.364 32.094,26.191 32.094,24.539 32.266,24.367 32.784,24.367 32.956,24.539 32.956,26.191 33.128,26.364 33.646,26.364 33.818,26.191 33.818,24.539 33.99,24.367 34.508,24.367 34.68,24.539 34.68,26.191 34.852,26.364 35.37,26.364 35.542,26.191 35.542,24.758 35.714,24.586 36.659,24.586 37.019,24.586 38.514,24.586 39.1,24 60.845,24 61.659,23.186 115.319,23.186 117.219,25.086 117.219,27.146 X10.15@118.339,28.266
LA1_12_1: IC8A.Y15 X6.13 | length 120.1
  Top Layer w0.145: v2(21.519,51.086) IC8A.Y15@22.019,50.586
  Mid-Layer 2 w0.1: v2(21.519,51.086) 21.519,51.591 22.319,52.391 22.319,53.829 23.837,55.347 23.837,58.483 27.431,62.076 44.166,62.076 44.216,62.076 44.302,62.162 44.388,62.248 44.388,62.412 44.561,62.584 45.078,62.584 45.25,62.412 45.25,61.74 45.423,61.568 45.94,61.568 46.112,61.74 46.112,62.412 46.285,62.584 46.802,62.584 46.974,62.412 46.974,61.74 47.147,61.568 47.664,61.568 47.836,61.74 47.836,62.412 48.009,62.584 48.526,62.584 48.698,62.412 48.698,61.74 48.871,61.568 49.388,61.568 49.56,61.74 49.56,62.412 49.733,62.584 50.25,62.584 50.422,62.412 50.422,61.74 50.595,61.568 51.112,61.568 51.284,61.74 51.284,62.412 51.457,62.584 51.974,62.584 52.146,62.412 52.146,61.74 52.319,61.568 52.836,61.568 53.008,61.74 53.008,62.412 53.181,62.584 53.698,62.584 53.87,62.412 53.87,61.74 54.043,61.568 54.56,61.568 54.732,61.74 54.732,62.412 54.905,62.584 55.422,62.584 55.594,62.412 55.594,61.74 55.767,61.568 56.284,61.568 56.456,61.74 56.456,61.904 56.629,62.076 56.936,62.076 85.109,62.076 85.944,62.91 118.595,62.91 X6.13@120.879,60.626
LA1_12_2: IC8B.Y15 X10.13 | length 118.7
  Top Layer w0.145: v2(21.519,15.186) IC8B.Y15@22.019,14.686
  Mid-Layer 2 w0.1: v2(21.519,15.186) 21.519,15.691 23.019,17.191 23.019,21.828 29.446,28.255 29.935,28.255 30.847,28.255 31.02,28.083 31.02,27.751 31.192,27.579 31.709,27.579 31.882,27.751 31.882,28.213 32.054,28.386 32.571,28.386 32.744,28.213 32.744,27.751 32.916,27.579 33.433,27.579 33.606,27.751 33.606,28.213 33.778,28.386 34.295,28.386 34.468,28.213 34.468,27.751 34.64,27.579 35.157,27.579 35.33,27.751 35.33,28.213 35.502,28.386 36.019,28.386 36.192,28.213 36.192,27.751 36.364,27.579 36.881,27.579 36.95,27.648 37.019,27.717 37.558,28.255 57.899,28.255 62.477,23.677 82.791,23.677 85.461,26.348 85.461,27.746 87.459,29.744 119.401,29.744 X10.13@120.879,28.266
LA1_13_1: IC8A.AA15 X6.11 | length 119.7
  Top Layer w0.145: v2(21.519,52.086) IC8A.AA15@22.019,51.586
  Mid-Layer 2 w0.1: v2(21.519,52.086) 22.119,52.686 22.119,53.912 22.223,54.016 22.223,57.708 28.093,63.577 67.119,63.577 68.031,63.577 68.204,63.405 68.204,63.242 68.376,63.069 68.893,63.069 69.066,63.242 69.066,63.576 69.238,63.748 69.755,63.748 69.928,63.576 69.928,63.242 70.1,63.069 70.617,63.069 70.79,63.242 70.79,63.576 70.962,63.748 71.479,63.748 71.652,63.576 71.652,63.242 71.824,63.069 72.341,63.069 72.514,63.242 72.514,63.576 72.686,63.748 73.203,63.748 73.376,63.576 73.376,63.242 73.548,63.069 74.065,63.069 74.238,63.242 74.238,63.576 74.41,63.748 74.927,63.748 75.1,63.576 75.1,63.242 75.272,63.069 75.789,63.069 75.962,63.242 75.962,63.576 76.134,63.748 76.651,63.748 76.824,63.576 76.824,63.242 76.996,63.069 77.513,63.069 77.686,63.242 77.686,63.576 77.858,63.748 78.375,63.748 78.548,63.576 78.548,63.242 78.72,63.069 79.237,63.069 79.41,63.242 79.41,63.576 79.582,63.748 80.099,63.748 80.272,63.576 80.272,63.242 80.444,63.069 80.961,63.069 81.134,63.242 81.134,63.576 81.306,63.748 81.823,63.748 81.996,63.576 81.996,63.242 82.168,63.069 82.685,63.069 82.858,63.242 82.858,63.405 83.03,63.577 83.844,63.577 120.468,63.577 X6.11@123.419,60.626
LA1_13_2: IC8B.AA15 X10.11 | length 116.5
  Top Layer w0.145: v2(21.519,16.186) IC8B.AA15@22.019,15.686
  Mid-Layer 2 w0.1: v2(21.519,16.186) 22.119,16.786 22.119,19.601 22.219,19.701 22.219,21.653 29.355,28.789 58.157,28.789 62.958,23.988 81.165,23.988 83.919,26.742 83.919,27.326 86.998,30.405 121.28,30.405 X10.11@123.419,28.266
LA1_14_1: IC8A.AB15 X6.9 | length 123.3
  Top Layer w0.145: v2(21.519,53.086) IC8A.AB15@22.019,52.586
  Mid-Layer 2 w0.1: v2(21.519,53.086) 21.169,53.436 21.169,54.231 21.833,54.895 21.833,58.528 27.652,64.347 109.93,64.347 109.981,64.347 110.153,64.519 110.153,64.683 110.325,64.855 110.843,64.855 111.015,64.683 111.015,64.145 111.187,63.972 111.705,63.972 111.877,64.145 111.877,64.683 112.049,64.855 112.567,64.855 112.739,64.683 112.739,64.145 112.911,63.972 113.429,63.972 113.601,64.145 113.601,64.683 113.773,64.855 114.291,64.855 114.463,64.683 114.463,64.145 114.635,63.972 115.153,63.972 115.325,64.145 115.325,64.683 115.497,64.855 116.015,64.855 116.187,64.683 116.187,64.145 116.359,63.972 116.877,63.972 117.049,64.145 117.049,64.683 117.221,64.855 117.739,64.855 117.911,64.683 117.911,64.145 118.083,63.972 118.601,63.972 118.773,64.145 118.773,64.683 118.945,64.855 119.463,64.855 119.635,64.683 119.635,64.145 119.807,63.972 120.325,63.972 120.497,64.145 120.497,64.609 120.669,64.782 121.187,64.782 121.359,64.609 121.359,64.519 121.531,64.347 121.846,64.347 122.238,64.347 X6.9@125.959,60.626
LA1_14_2: IC8B.AB15 X10.9 | length 119.7
  Top Layer w0.145: v2(21.519,17.186) IC8B.AB15@22.019,16.686
  Mid-Layer 2 w0.1: v2(21.519,17.186) 21.169,17.536 21.169,18.331 21.833,18.995 21.833,22.096 29.013,29.276 58.39,29.276 63.292,24.374 80.029,24.374 87.417,31.762 122.463,31.762 X10.9@125.959,28.266
LA1_15_1: IC8A.AB16 X6.7 | length 118.6
  Top Layer w0.145: v2(20.519,53.086) IC8A.AB16@21.019,52.586
  Mid-Layer 2 w0.1: v2(20.519,53.086) 20.519,53.402 20.859,53.742 20.859,54.378 21.519,55.039 21.519,59.008 27.89,65.379 123.746,65.379 X6.7@128.499,60.626
LA1_15_2: IC8B.AB16 X10.7 | length 123.4
  Top Layer w0.145: v2(20.519,17.186) IC8B.AB16@21.019,16.686
  Mid-Layer 2 w0.1: v2(20.519,17.186) 20.519,17.502 20.859,17.842 20.859,18.478 21.438,19.057 21.438,22.438 28.688,29.688 58.686,29.688 63.686,24.688 79.39,24.688 87.182,32.48 124.285,32.48 X10.7@128.499,28.266
LACK0_1: IC8A.G11 X5.3 | length 116.5
  Top Layer w0.145: IC8A.G11@26.019,37.586 v2(26.519,37.086)
  Bottom Layer w0.1: v2(26.519,37.086) 27.118,36.487 55.218,36.487 55.85,35.855 62.389,35.855 64.619,38.086 64.619,39.836 66.524,41.741 74.944,41.741 81.904,48.701 129.454,48.701 X5.3@133.709,44.446
LACK0_2: IC8B.G11 X9.3 | length 118
  Top Layer w0.145: IC8B.G11@26.019,1.686 v2(26.519,1.186)
  Mid-Layer 2 w0.1: v2(26.519,1.186) 27.142,1.808 31.142,1.808 33.019,3.686 35.908,3.686 38.019,5.797 53.119,5.797 53.837,6.515 55.727,6.515 55.998,6.786 73.67,6.786 78.018,11.134 78.018,12.295 83.849,18.126 127.539,18.126 X9.3@133.579,12.086
LACK1_1: IC8A.W16 X6.3 | length 128.3
  Top Layer w0.145: v2(20.519,50.086) IC8A.W16@21.019,49.586
  Mid-Layer 2 w0.1: 20.178,53.745 20.169,53.736 ; v2(20.519,50.086) 20.519,50.84 20.169,51.19 20.169,53.736 ; X6.3@133.579,60.626 128.044,66.161 27.594,66.161 21.219,59.786 21.219,55.104 20.169,54.054 20.169,53.736
LACK1_2: IC8B.W16 X10.3 | length 125.1
  Top Layer w0.145: v2(20.519,14.186) IC8B.W16@21.019,13.686
  Mid-Layer 2 w0.1: v2(20.519,14.186) 20.957,14.186 21.122,14.021 21.85,14.021 23.236,15.407 23.236,16.619 23.809,17.193 23.809,20.957 26.058,23.207 28.375,23.207 28.757,23.588 60.04,23.588 61.742,21.886 128.919,21.886 132.296,25.263 132.296,26.983 X10.3@133.579,28.266
LED_CDCE_PLL_LOCK: DD13.11 R147.1 | length 13.6
  Top Layer w0.15: R147.1@-74.808,-6.514 -72.987,-6.514 -71.697,-5.224 -64.597,-5.224 -63.797,-6.024 DD13.11@-63.797,-7.724
LED_CLK_ERR: DD5.4 R161.1 | length 32.9
  Top Layer w0.2: R161.1@97.519,-0.081 98.424,-0.081 98.785,0.279 98.785,1.2 99.619,2.035 99.619,3.768 102.324,6.473 115.569,6.473 117.719,4.323 DD5.4@117.719,-3.214
LED_CLK_IN: DD5.3 R160.1 | length 32.8
  Top Layer w0.2: R160.1@97.519,2.336 98.707,2.336 99.119,2.748 99.119,4.25 102.001,7.132 116.149,7.132 118.519,4.762 DD5.3@118.519,-3.214
LED_Module_ready: DD5.5 R162.1 | length 33.1
  Top Layer w0.2: R162.1@97.519,-2.347 98.412,-2.347 99.431,-1.329 99.431,0.758 100.119,1.446 100.119,3.453 102.482,5.816 114.987,5.816 116.919,3.885 DD5.5@116.919,-3.214